# Altium PCB Mach trai tim.PcbDoc
Units mm, origin at the board's own origin, x right, y up, seen from the top; angles counter-clockwise.
Board outline 100 x 100 mm, 2 copper layers (Top Layer, Bottom Layer); 28 components, 26 nets, 77 pads, 0 vias.
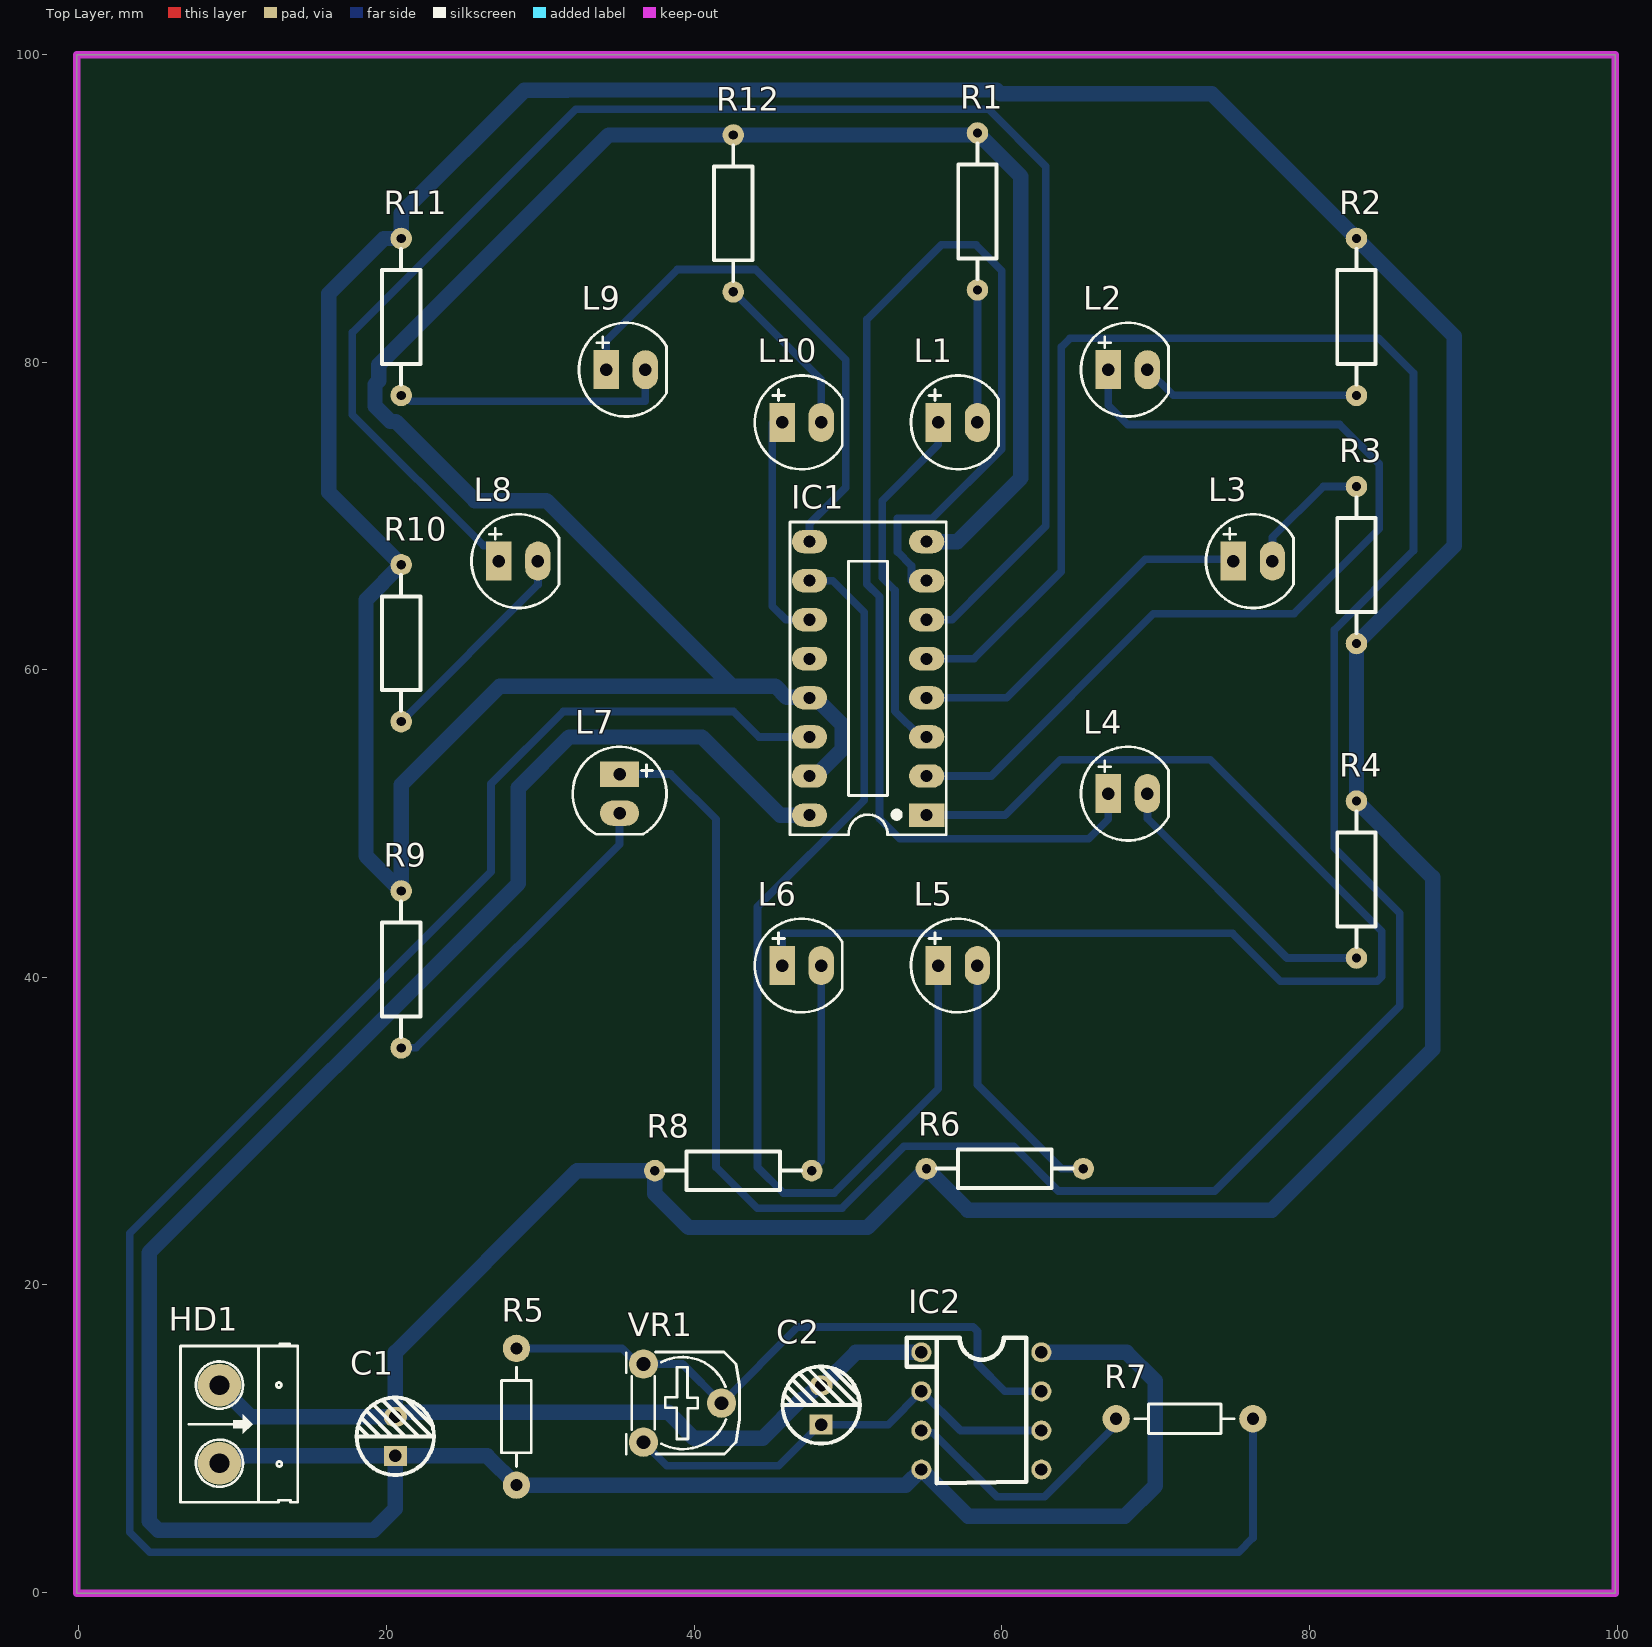
[diagram p0: Top Layer view]
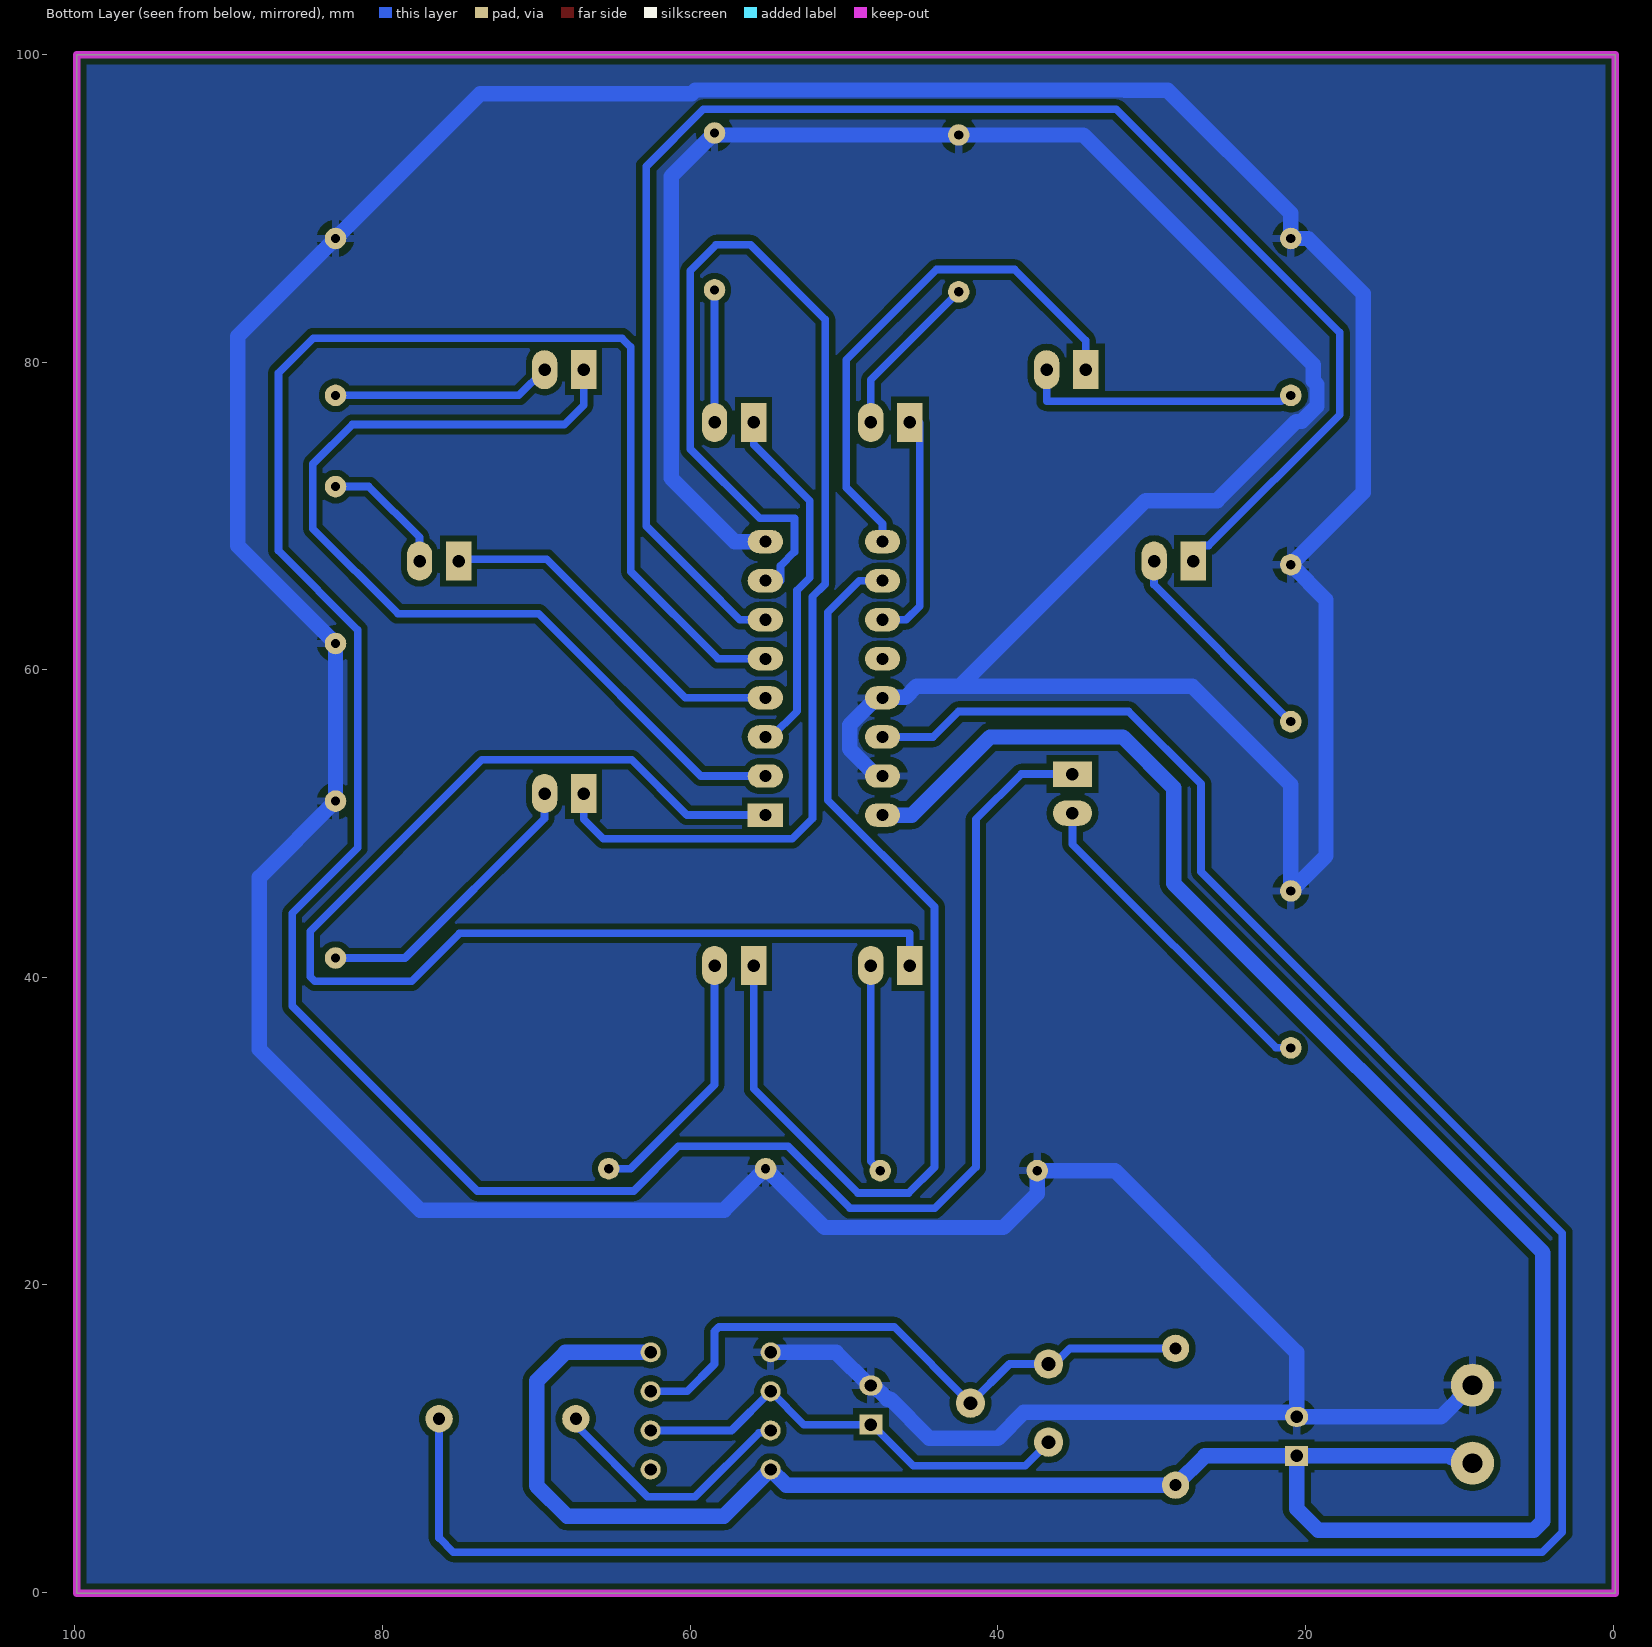
[diagram p1: Bottom Layer view, seen from below]
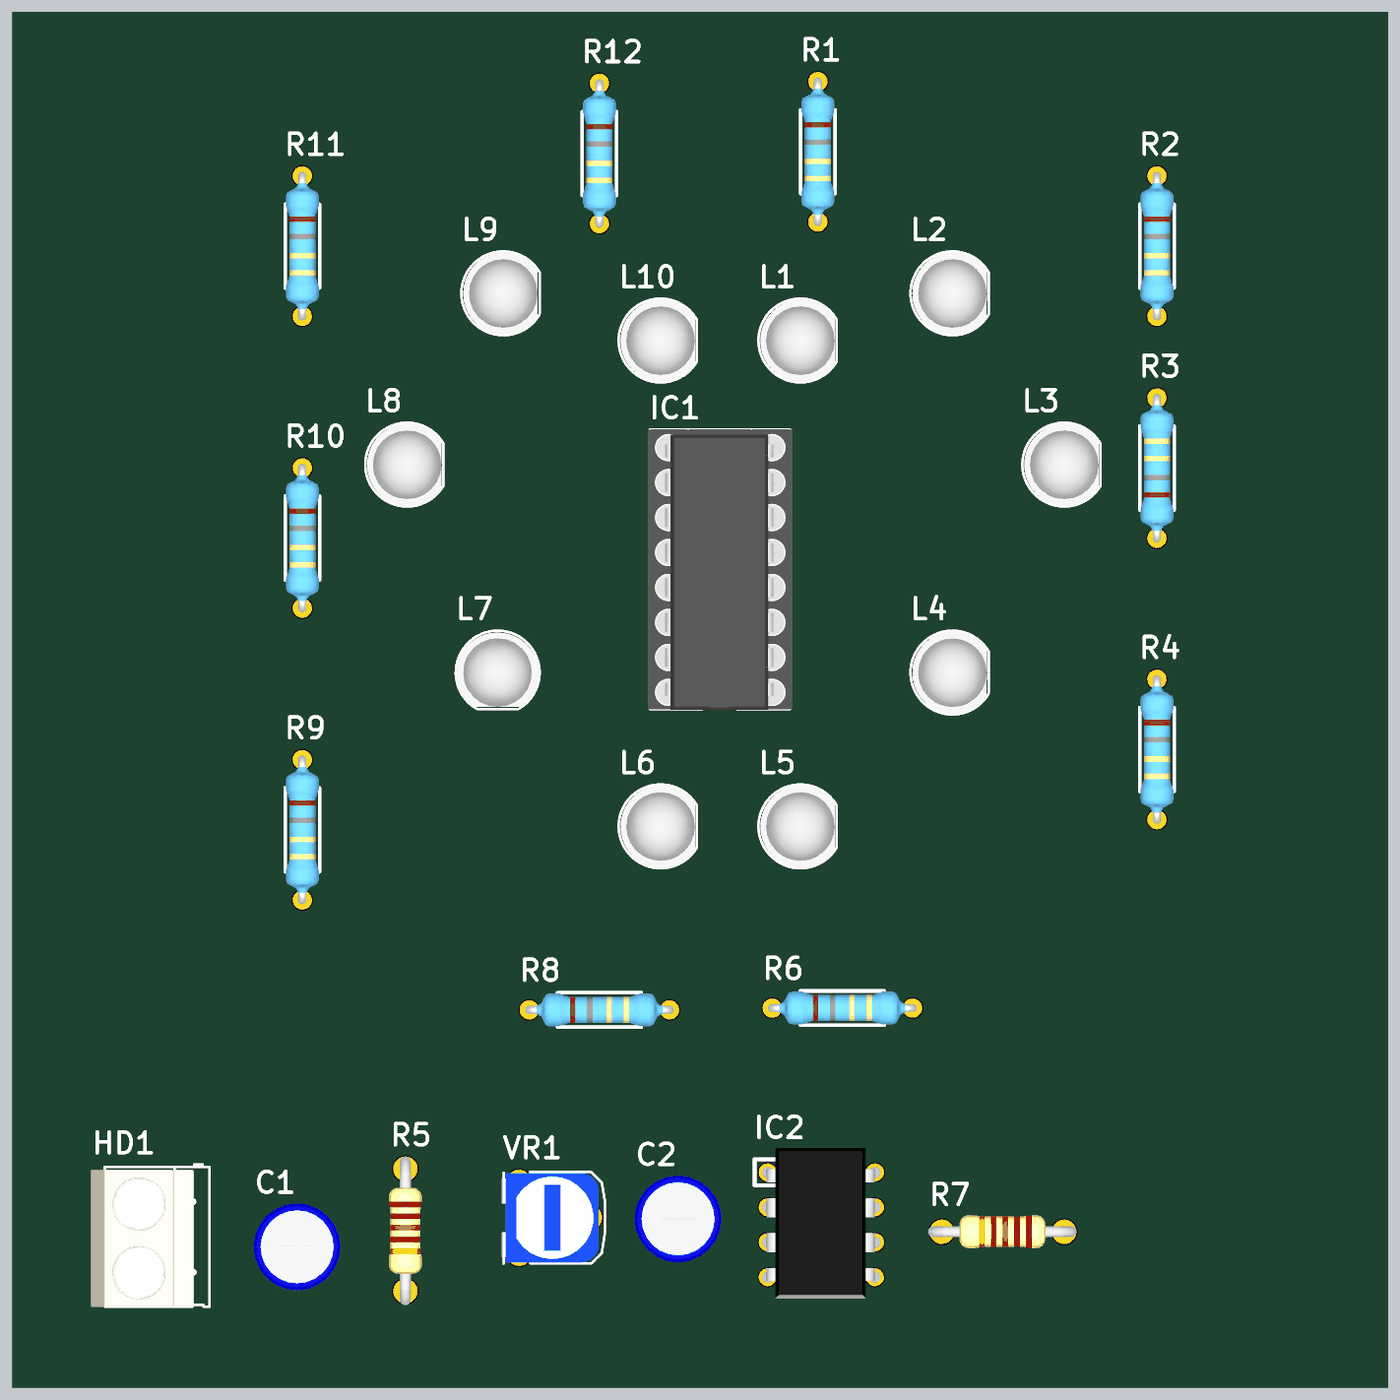
[diagram p2: 3D render of the assembled board from above, using the file's embedded part models]

## Layer stack, top to bottom
Top Solder: solder mask 0.0102, Solder Resist, Dk 3.5
Top Layer: signal copper 0.0356
Dielectric 1: dielectric 0.32, FR-4, Dk 4.8
Bottom Layer: signal copper 0.0356
Bottom Solder: solder mask 0.0102, Solder Resist, Dk 3.5

## Board outline
-0.127,-0.033 99.873,-0.033 99.873,99.967 -0.127,99.967

## Design rules (kind name [scope] priority, off if disabled: settings)
Clearance [All] p1: gap=0.5 ignorepadtopadclearanceinfootprint=FALSE except(0.4: Arc-Fill Arc-Poly Arc-Region Track-Fill Track-Poly Track-Region SMDPad-Fill SMDPad-Poly SMDPad-Region THPad-Fill THPad-Poly THPad-Region Via-Fill Via-Poly Via-Region Fill-Fill Fill-Poly Fill-Region Poly-Poly Poly-Region Region-Region)
PolygonConnect [All] p1: connectstyle=Relief reliefconductorwidth=0.5 reliefentries=4 polygonreliefangle="90 Angle" airgapwidth=0.5
RoutingLayers [All] p1: top layer_v5=FALSE bottom layer_v5=TRUE
RoutingVias [All] p1: holewidth=0.711 width=1.27 viastyle="Through Hole" minholewidth=0.711 minwidth=1.27 maxholewidth=0.711 maxwidth=1.27
SolderMaskExpansion [All] p1: expansion=0.102 istentingtop=FALSE
Width [All] p1: maxlimit=2 minlimit=0.3 preferedwidth=0.5
29 further rules are at their usual default settings.

## Components (designator, comment, footprint, x,y, rotation, side; value= is the part's Value field where it differs from the comment)
C1 "1uF, 50V" "tu hoa 5mm" 20.574,10.16 r90 top
C2 "1uF, 50V" "tu hoa 5mm" 48.26,12.192 r90 top
HD1 "9VDC" HED2 9.144,13.492 r270 top value="Header 2"
IC1 "4017" DIP16/W0.3 55.118,50.546 r90 top value=CD4017
IC2 "LM555 DIP8" LM555 58.674,11.811 r270 top
L1 "LED 5mm" LED-5MM-RED 55.88,76.073 r0 top
L2 "LED 5mm" LED-5MM-RED 66.929,79.502 r0 top
L3 "LED 5mm" LED-5MM-RED 75.057,67.056 r0 top
L4 "LED 5mm" LED-5MM-RED 66.929,51.943 r0 top
L5 "LED 5mm" LED-5MM-RED 55.88,40.767 r0 top
L6 "LED 5mm" LED-5MM-RED 45.72,40.767 r0 top
L7 "LED 5mm" LED-5MM-RED 35.154,53.213 r270 top
L8 "LED 5mm" LED-5MM-RED 27.305,67.056 r0 top
L9 "LED 5mm" LED-5MM-RED 34.29,79.502 r0 top
L10 "LED 5mm" LED-5MM-RED 45.72,76.073 r0 top
R1 "1k5, 1/4W" "tro vach 1/4w" 58.42,89.789 r90 top
R2 "1k5, 1/4W" "tro vach 1/4w" 83.058,82.931 r90 top
R3 "1k5, 1/4W" "tro vach 1/4w" 83.058,66.802 r270 top
R4 "1k5, 1/4W" "tro vach 1/4w" 83.058,46.355 r90 top
R5 "10k, 1/4W" R1/4W 28.448,6.985 r90 top value="R1/4W - 1K"
R6 "1k5, 1/4W" "tro vach 1/4w" 60.198,27.559 r180 top
R7 "10k, 1/4W" R1/4W 67.437,11.303 r0 top value="R1/4W - 1K"
R8 "1k5, 1/4W" "tro vach 1/4w" 42.545,27.432 r180 top
R9 "1k5, 1/4W" "tro vach 1/4w" 20.955,40.513 r90 top
R10 "1k5, 1/4W" "tro vach 1/4w" 20.955,61.722 r90 top
R11 "1k5, 1/4W" "tro vach 1/4w" 20.955,82.931 r90 top
R12 "1k5, 1/4W" "tro vach 1/4w" 42.545,89.662 r90 top
VR1 "100K" "Bien Tro Tam Giac Dung" 36.703,14.859 r270 top

## Footprints (in the part's own frame and the unit in brackets; to place one, negate y for a bottom-side part, rotate by r counter-clockwise, add the part's x,y. Pads: shape width x height; smd on the part's side, far side on the other; paste and mask are expansions set on the pad)
"Bien Tro Tam Giac Dung" [mil] "RM065"
  round 75 hole 35: 1(0,0) 2(100,200) 3(200,0)
  silkscreen extent -31,-44 231,246, body extent -28,-50 228,228, height 279
DIP16/W0.3 [mil] "16 PIN, W 300mil, Pin to pin 100mil"
  rect 60x90 hole 31: 1(0,0)
  oval 60x90 hole 31: 2(100,0) 3(200,0) 4(300,0) 5(400,0) 6(500,0) 7(600,0) 8(700,0) 9(700,300) 10(600,300) 11(500,300) 12(400,300) 13(300,300) 14(200,300) 15(100,300) 16(0,300)
  silkscreen extent -50,-50 750,350, body extent -52,-57 752,356, height 299
HED2 [mil] "Header 2, 2 pin, hight 300mil, Pin to Pin 200, Colour Green"
  round 110 hole 50: 1(0,0) 2(200,0)
  silkscreen extent -106,-100 300,200, body extent -92,-140 302,155, height 394
LED-5MM-RED [mil] "LED 2 PIN, 5 ly , Only colour,pin to pin 100mil"
  rect 65x100 hole 32: 1(0,0)
  oval 65x100 hole 32: 2(100,0)
  silkscreen extent -70,-120 154,120, body extent -65,-119 149,118, height 339
LM555 [mm] "DIP8"
  round 1.3 hole 0.8 mask+0.1: 1(-3.81,-3.9) 2(-1.27,-3.9) 3(1.27,-3.9) 4(3.81,-3.9) 5(3.81,3.9) 6(1.27,3.9) 7(-1.27,3.9) 8(-3.81,3.9)
  silkscreen extent -4.77,-4.85 4.69,2.9, body extent -5.57,-4 5.35,3.87, height 5.38
R1/4W [mil] "R 1/4W, 2 Pin, 350mil"
  round 70 hole 31: 1(0,0) 2(350,0)
  silkscreen extent 48,-38 302,38, body extent -40,-47 386,47, height 111
"tro vach 1/4w" [mm]
  round 1.4 hole 0.6: 1(-5.1,0) 2(5.1,0)
  silkscreen extent -4.39,-1.25 4.42,1.25, body extent -5.38,-1.2 5.38,1.2, height 2.41
"tu hoa 5mm" [mm]
  rect 1.3x1.5 hole 0.8: 1(-1.27,0)
  oval 1.3x1.5 hole 0.8: 2(1.27,0)
  silkscreen extent -2.51,-2.51 2.51,2.51, body extent -3.12,-3.18 3.23,3.18, height 14.55

## Part data
C1 C2: library part "Tu Hoa 1uF 50V 5x11", "Cắm", Chung_Loai=Cắm, Don_Vi=Con, Ma_Hang=MH001355, So_Chan=2, Ten_Linh_Kien="Tụ Hóa 1uF 50V 5x11MM"
HD1: library part Hed2, "Header 2 (Green)"
IC1: "Decade Counter/Divider with 10 Decoded Outputs", Designed by=VanDungEvn
IC2: library part LM555, Supplier Part Number 1=926-LM555CN/NOPB, Supplier 1=Mouser
L1 L2 L3 L4 L5 L6 L7 L8 L9 L10: library part "LED 5mm Do", "Cắm", Chung_Loai=Cắm, Don_Vi=Con, Ma_Hang=MH008967, Ten_Linh_Kien="Led 5MM Phủ Đỏ (1000c)"
R1 R2 R3 R4 R6 R8 R9 R10 R11 R12: library part "Tro Vach 1/4W 5% 1k", "Cắm", Chung_Loai=Cắm, Don_Vi=Con, Ma_Hang=MH007390, So_Chan=2, Ten_Linh_Kien="Trở Vạch 1/4w 5% 1k"
R5 R7: library part R1/4W, "Resistor 1/4W"
VR1: library part "Bien tro tam giac 100K Dung", "Cắm", Chung_Loai=Cắm, Don_Vi=Con, Ma_Hang=MH003711, Ten_Linh_Kien="Biến Trở Tam Giác 104-100K RM065"

## Nets (pads, with @x,y where several pads share a name; then routed paths per layer and width w, separated by ;. In a path a pad name is that pad's centre, name@x,y a point inside that pad or via, vN(x,y) a via of type N, cw(c..) or ccw(c..) an arc to the next point about the centre after c; other vN are vias at no path point)
GND: C1.2 C2.2 HD1.1 IC1.8 IC1.13 IC1.15 IC2.1 R1.2 R2.2 R3.2 R4.2 R6.2 R8.2 R9.2 R10.2 R11.2 R12.2 | length 469.4
  Bottom Layer w1: HD1.1 11.206,11.43 C1.2 ; IC1.15 47.879,53.086 49.641,54.848 49.641,56.404 47.879,58.166 IC1.13 47.466,58.198 46.011,58.198 45.281,58.928 42.456,58.928 ; IC2.1 50.519,15.621 48.36,13.462 C2.2 48.079,13.462 47.189,12.572 46.989,12.572 44.45,10.033 40.005,10.033 38.306,11.732 21.057,11.732 20.755,11.43 C1.2 ; IC1.8 57.112,68.326 61.246,72.46 61.246,92.064 R1.2 58.293,94.762 R12.2 34.437,94.762 19.505,79.83 19.505,78.785 19.255,78.535 19.255,77.127 20.251,76.131 20.604,76.131 25.742,70.993 30.391,70.993 42.456,58.928 ; C1.2 20.574,15.621 32.385,27.432 R8.2 37.445,25.928 39.641,23.732 51.271,23.732 R6.2 57.798,24.859 77.564,24.859 88.011,35.306 88.011,46.502 R4.2 R3.2 89.408,68.052 89.408,81.681 R2.2 73.642,97.447 59.896,97.447 59.662,97.681 31.778,97.681 31.76,97.663 28.956,97.663 20.955,89.662 R11.2 19.832,88.031 16.256,84.455 16.256,71.521 R10.2 18.669,64.536 18.669,47.899 R9.2 20.955,52.515 27.368,58.928 42.456,58.928
NetC2_1: C2.1 IC2.2 IC2.6 VR1.3 | length 29.6
  Bottom Layer w0.5: VR1.3 38.227,8.255 45.493,8.255 48.16,10.922 C2.1 52.615,10.922 IC2.2 57.314,10.541 IC2.6
NetIC1_1: IC1.1 L6.1 | length 81.1
  Bottom Layer w0.5: L6.1 45.72,42.863 74.993,42.863 78.105,39.751 84.416,39.751 84.709,40.044 84.709,42.99 73.558,54.14 63.805,54.14 60.211,50.546 IC1.1
NetIC1_2: IC1.2 L2.1 | length 61.8
  Bottom Layer w0.5: IC1.2 59.309,53.086 69.85,63.627 78.994,63.627 84.531,69.164 84.531,73.368 81.966,75.933 68.199,75.933 66.929,77.203 L2.1
NetIC1_3: IC1.3 L1.1 | length 23.4
  Bottom Layer w0.5: IC1.3 54.737,55.626 53.054,57.309 53.054,65.157 52.225,65.986 52.225,70.983 55.88,74.638 L1.1
NetIC1_4: IC1.4 L3.1 | length 23.7
  Bottom Layer w0.5: IC1.4 60.312,58.166 69.329,67.183 74.93,67.183 L3.1
NetIC1_5: IC1.5 L7.1 | length 178.3
  Bottom Layer w0.5: L7.1 38.481,53.213 41.427,50.267 41.427,27.648 44.093,24.982 49.607,24.982 53.645,29.02 60.769,29.02 63.68,26.109 73.848,26.109 85.872,38.133 85.872,44.161 81.608,48.425 81.608,62.573 86.761,67.727 86.761,79.291 84.506,81.547 64.44,81.547 63.865,80.972 63.865,66.38 58.191,60.706 IC1.5
NetIC1_6: IC1.6 L8.1 | length 105.3
  Bottom Layer w0.5: L8.1 27.305,67.5 26.729,68.076 26.285,68.076 17.78,76.581 17.78,81.915 32.296,96.431 59.144,96.431 62.865,92.71 62.865,69.342 59.157,65.634 56.769,63.246 IC1.6
NetIC1_7: IC1.7 L4.1 | length 87.5
  Bottom Layer w0.5: IC1.7 54.127,65.786 54.127,66.751 53.225,67.653 53.225,69.838 55.487,69.838 59.996,74.347 59.996,85.943 58.321,87.617 56.083,87.617 51.225,82.759 51.225,65.571 52.054,64.742 52.054,50.321 53.365,49.009 65.659,49.009 66.929,50.279 L4.1
NetIC1_9: IC1.9 L9.1 | length 34.6
  Bottom Layer w0.5: L9.1 34.29,81.394 38.908,86.012 43.993,86.012 49.86,80.145 49.86,71.844 47.498,69.482 IC1.9
NetIC1_10: IC1.10 L5.1 | length 66.6
  Bottom Layer w0.5: IC1.10 49.01,65.786 51.054,63.742 51.054,51.524 44.12,44.59 44.12,27.648 45.786,25.982 49.109,25.982 55.88,32.753 L5.1
NetIC1_11: IC1.11 L10.1 | length 15.4
  Bottom Layer w0.5: L10.1 45.72,76.06 45.085,76.06 45.085,64.135 45.974,63.246 IC1.11
NetIC1_14: IC1.14 R7.2 | length 163.4
  Bottom Layer w0.5: IC1.14 44.213,55.626 42.562,57.277 31.496,57.277 26.797,52.578 26.797,46.863 3.302,23.368 3.302,3.937 4.61,2.629 75.4,2.629 76.327,3.556 R7.2
NetIC2_3: IC2.3 R7.1 | length 16.8
  Bottom Layer w0.5: IC2.3 54.927,10.388 55.525,10.388 59.69,6.223 62.776,6.223 67.192,10.64 67.192,11.058 R7.1
NetIC2_7: IC2.7 R5.2 VR1.1 VR1.2 | length 40.6
  Bottom Layer w0.5: R5.2 35.311,15.875 36.327,14.859 39.243,14.859 VR1.2 46.736,17.272 58.127,17.272 58.42,16.979 58.42,14.859 60.198,13.081 IC2.7
NetL1_2: L1.2 R1.1 | length 8.6
  Bottom Layer w0.5: L1.2 R1.1
NetL2_2: L2.2 R2.1 | length 14.3
  Bottom Layer w0.5: L2.2 71.14,77.831 R2.1
NetL3_2: L3.2 R3.1 | length 8.4
  Bottom Layer w0.5: L3.2 77.597,68.6 80.899,71.902 R3.1
NetL4_2: L4.2 R4.1 | length 19
  Bottom Layer w0.5: L4.2 69.469,50.33 78.544,41.255 R4.1
NetL5_2: L5.2 R6.1 | length 16.9
  Bottom Layer w0.5: L5.2 58.42,33.02 63.881,27.559 R6.1
NetL6_2: L6.2 R8.1 | length 13.6
  Bottom Layer w0.5: R8.1 48.26,28.047 L6.2
NetL7_2: L7.2 R9.1 | length 21.7
  Bottom Layer w0.5: R9.1 21.913,35.413 35.154,48.654 L7.2
NetL8_2: L8.2 R10.1 | length 14.1
  Bottom Layer w0.5: R10.1 29.845,65.512 L8.2
NetL9_2: L9.2 R11.1 | length 18.1
  Bottom Layer w0.5: R11.1 21.199,77.831 21.572,77.457 36.83,77.457 L9.2
NetL10_2: L10.2 R12.1 | length 10.9
  Bottom Layer w0.5: R12.1 48.26,78.847 L10.2
VCC: C1.1 HD1.2 IC1.16 IC2.4 IC2.8 R5.1 | length 179.6
  Bottom Layer w1: HD1.2 9.487,8.756 10.492,8.756 10.627,8.89 C1.1 ; IC1.16 45.593,50.546 40.513,55.626 31.877,55.626 28.575,52.324 28.575,46.101 4.572,22.098 4.572,4.65 5.158,4.064 19.177,4.064 20.574,5.461 C1.1 ; IC2.8 68.121,15.621 69.977,13.765 69.977,6.937 68.013,4.973 57.802,4.973 IC2.4 53.758,6.985 R5.1 26.543,8.89 C1.1
pads on no net: IC1.12 IC2.5

## Polygon pours and split planes (outlines as drawn)
GND on Bottom Layer "NONET_L-01_P-001" (solid, pour order 0): -0.127,99.949 99.822,99.949 99.822,0 0,0

## Keep-outs
Keep-Out Layer:
  the board outline again, w0.5

## Dimensions
-0.127,99.967 to -0.127,-0.033 on Mechanical 10
-0.127,99.967 to 99.873,99.967 on Mechanical 10

## Text inside footprints (layer, text, board x,y; h text height)
IC2: Mechanical 2 "1" at 55.927,15.796 h0.5 r270; Mechanical 2 "4" at 56.118,8.073 h0.5 r270; Mechanical 2 "5" at 61.014,8.061 h0.5 r270; Mechanical 2 "8" at 60.848,15.8 h0.5 r270